# EAGLE board mainboard_eurobotics2010_r1 (EAGLE 4.16)
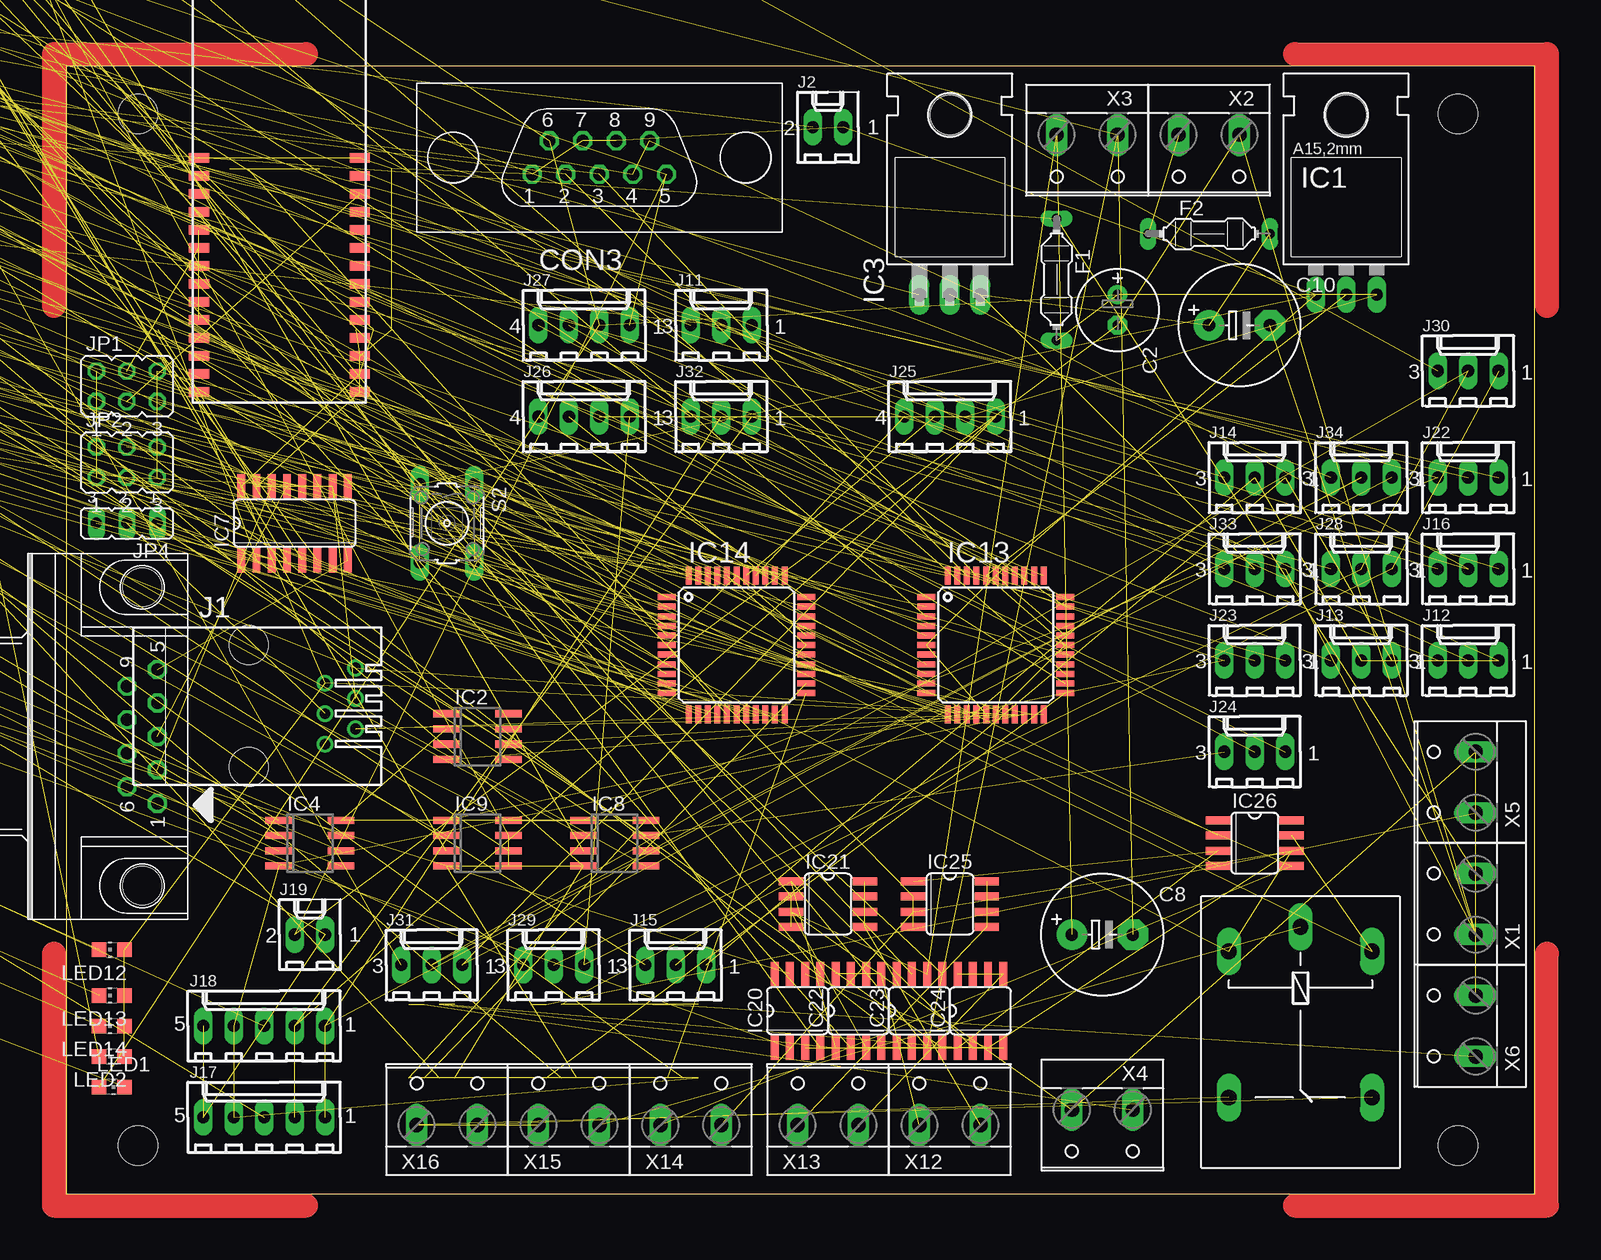
[diagram p0: board, top side]
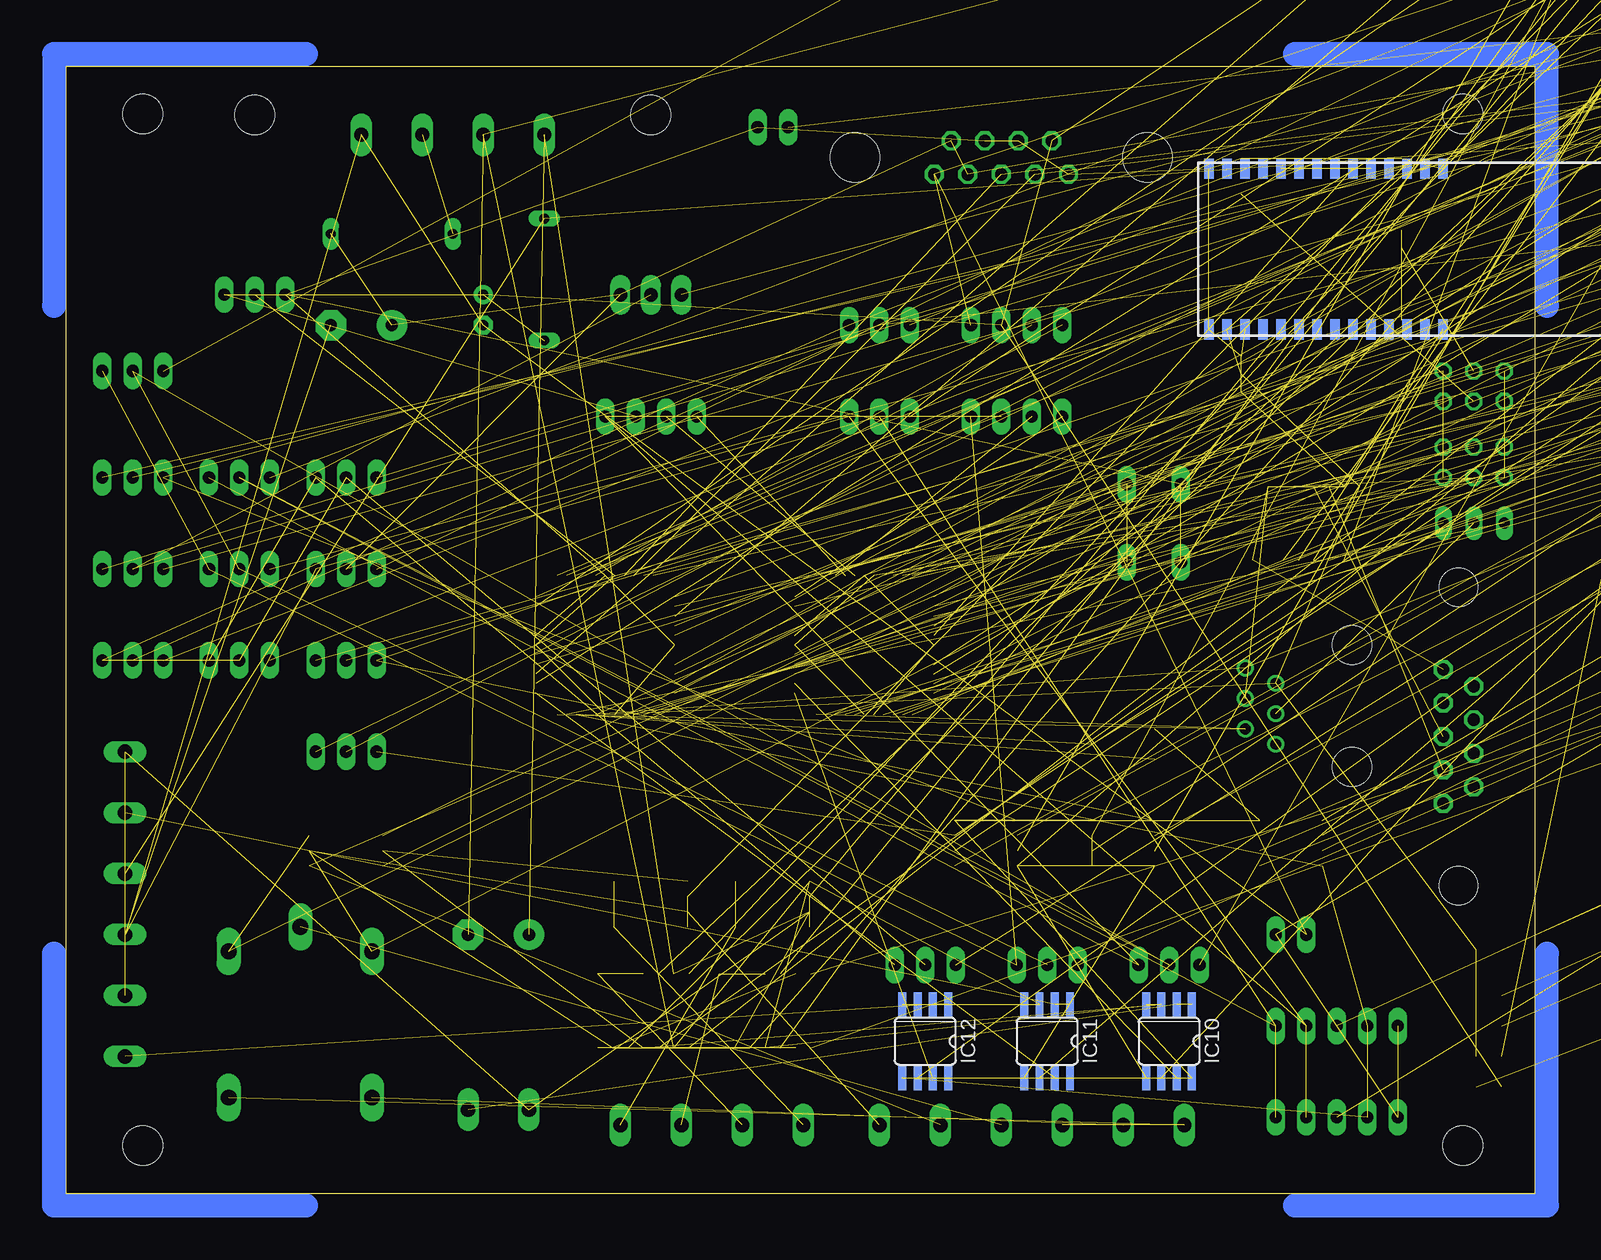
[diagram p1: board, bottom side, seen from below]

Size 122.4 x 94 mm. Coordinates in mm from the lower left corner, seen from the top.
Outline: 0,0 122.4,0 122.4,94 0,94 0,0
Copper layers (1*16): Top 0.035mm / dielectric 1.5mm / Bottom 0.035mm
Design rules "default": minimum track width 10mil, minimum drill 24mil, track to track 8mil, track to pad 8mil, pad to pad 8mil, via to via 8mil, smd to smd 8mil, copper to edge 40mil, drill to drill 8mil, minimum pad ring 10mil, minimum via ring 8mil, stop-mask expansion 4mil, vias tented up to drill 0mil, thermal gap 10mil
Holes 3.3 mm at 6,4 116,4 6,90 116,90

## Footprints (pad centres in the part's own frame; a part is rotated, then mirrored left to right if it is on the bottom)
C0805 = smd 1.3 x 1.5: 1 -0.85,0; 2 0.85,0
E2,5-7 = drill 0.813 pad 1.6 round: + -1.27,0 | drill 0.813 pad 1.6 octagon: - 1.27,0
SMC_D = smd 2.4 x 2.8: + -3.15,0; - 3.15,0
C1206 = smd 1.6 x 1.8: 1 -1.4,0; 2 1.4,0
E5-10,5 = drill 1.016 pad 2.54 round: + -2.54,0 | drill 1.016 pad 2.54 octagon: - 2.54,0
D-09F/90 = drill 1.016 pad 1.575 octagon: 1 -5.588,-1.27; 2 -2.794,-1.27; 3 0,-1.27; 4 2.794,-1.27; 5 5.588,-1.27; 6 -4.191,1.27; 7 -1.397,1.27; 8 1.397,1.27; 9 4.191,1.27 | hole 3.2: 12.446,0; -12.446,0
D-09F = drill 1.016 pad 1.575 octagon: 1 5.588,1.397; 2 2.794,1.397; 3 0,1.397; 4 -2.794,1.397; 5 -5.588,1.397; 6 4.191,-1.397; 7 1.397,-1.397; 8 -1.397,-1.397; 9 -4.191,-1.397 | hole 4.115: 12.192,0; -12.192,0
DIOM5436X265N = smd 2.2 x 2.05: A 2.2,0; K -2.2,0
PICOFUSE = drill 0.813 long: 1 -5.08,0; 2 5.08,0
TO220L1 = drill 1.016 long: 1 -2.54,-3.81; 2 0,-3.81; 3 2.54,-3.81 | hole 3.302: 0,11.176
SOIC8 = smd 0.6 x 2.2: 1 -1.905,-2.6; 2 -0.635,-2.6; 3 0.635,-2.6; 4 1.905,-2.6; 5 1.905,2.6; 6 0.635,2.6; 7 -0.635,2.6; 8 -1.905,2.6
TO220H = drill 1.118 long: 1 -2.54,-10.16; 2 0,-10.16; 3 2.54,-10.16 | hole 3.302: 0,4.826
SO08 = smd 0.6 x 2.2: 1 -1.905,-2.6; 2 -0.635,-2.6; 3 0.635,-2.6; 4 1.905,-2.6; 5 1.905,2.6; 6 0.635,2.6; 7 -0.635,2.6; 8 -1.905,2.6
WT11 = smd 1.7 x 0.8: 1 -6.7,2.5; 2 -6.7,1; 3 -6.7,-0.5; 4 -6.7,-2; 5 -6.7,-3.5; 6 -6.7,-5; 7 -6.7,-6.5; 8 -6.7,-8; 9 -6.7,-9.5; 10 -6.7,-11; 11 -6.7,-12.5; 12 -6.7,-14; 13 -6.7,-15.5; 14 -6.7,-17; 15 6.7,-17; 16 6.7,-15.5; 17 6.7,-14; 18 6.7,-12.5; 19 6.7,-11; 20 6.7,-9.5; 21 6.7,-8; 22 6.7,-6.5; 23 6.7,-5; 24 6.7,-3.5; 25 6.7,-2; 26 6.7,-0.5; 27 6.7,1; 28 6.7,2.5
SO16 = smd 0.66 x 2.032: 1 -4.445,-3.073; 2 -3.175,-3.073; 3 -1.905,-3.073; 4 -0.635,-3.073; 5 0.635,-3.073; 6 1.905,-3.073; 7 3.175,-3.073; 8 4.445,-3.073; 9 4.445,3.073; 10 3.175,3.073; 11 1.905,3.073; 12 0.635,3.073; 13 -0.635,3.073; 14 -1.905,3.073; 15 -3.175,3.073; 16 -4.445,3.073
SO08' = smd 0.66 x 2.032: 1 -1.905,-3.073; 2 -0.635,-3.073; 3 0.635,-3.073; 4 1.905,-3.073; 5 1.905,3.073; 6 0.635,3.073; 7 -0.635,3.073; 8 -1.905,3.073
TQFP44 = smd 1.5 x 0.5: 1 -5.8,4; 2 -5.8,3.2; 3 -5.8,2.4; 4 -5.8,1.6; 5 -5.8,0.8; 6 -5.8,0; 7 -5.8,-0.8; 8 -5.8,-1.6; 9 -5.8,-2.4; 10 -5.8,-3.2; 11 -5.8,-4; 23 5.8,-4; 24 5.8,-3.2; 25 5.8,-2.4; 26 5.8,-1.6; 27 5.8,-0.8; 28 5.8,0; 29 5.8,0.8; 30 5.8,1.6; 31 5.8,2.4; 32 5.8,3.2; 33 5.8,4 | smd 0.5 x 1.5: 12 -4,-5.8; 13 -3.2,-5.8; 14 -2.4,-5.8; 15 -1.6,-5.8; 16 -0.8,-5.8; 17 0,-5.8; 18 0.8,-5.8; 19 1.6,-5.8; 20 2.4,-5.8; 21 3.2,-5.8; 22 4,-5.8; 34 4,5.8; 35 3.2,5.8; 36 2.4,5.8; 37 1.6,5.8; 38 0.8,5.8; 39 0,5.8; 40 -0.8,5.8; 41 -1.6,5.8; 42 -2.4,5.8; 43 -3.2,5.8; 44 -4,5.8
520470-3 = drill 0.889 round: 1 -3.175,8.89; 2 -1.905,6.35; 3 -0.635,8.89; 4 0.635,6.35; 5 1.905,8.89; 6 3.175,6.35 | hole 3.251: -5.08,0; 5.08,0
6410-02 = drill 1.016 long: 1 1.27,0; 2 -1.27,0
6410-03 = drill 1.016 long: 1 2.54,0; 2 0,0; 3 -2.54,0
6410-05 = drill 1.016 long: 1 5.08,0; 2 2.54,0; 3 0,0; 4 -2.54,0; 5 -5.08,0
6410-04 = drill 1.016 long: 1 3.81,0; 2 1.27,0; 3 -1.27,0; 4 -3.81,0
JP3Q = drill 0.914 octagon: 1 -2.54,-1.27; 2 -2.54,1.27; 3 0,-1.27; 4 0,1.27; 5 2.54,-1.27; 6 2.54,1.27
JP2 = drill 0.914 long: 1 -2.54,0; 2 0,0; 3 2.54,0
G5LE = drill 1.321 long: 1 -7.493,-5.969; 2 -7.493,5.969; O 4.699,5.969; P -9.525,0; S 4.699,-5.969
CHIP-LED0805 = smd 1.2 x 1.2: A 0,-1.05; C 0,1.05
R0805 = smd 1.3 x 1.5: 1 -0.85,0; 2 0.85,0
B3F-10XX = drill 1.016 long: 1 -3.251,2.261; 2 3.251,2.261; 3 -3.251,-2.261; 4 3.251,-2.261
W237-132 = drill 1.194 long: 1 -2.54,-0.635; 2 2.54,-0.635

## Placement (x,y rotation side)
C1  100nF  [C0805]  -144.78,142.24 0 top  (outside the outline)
C2  220uF/10V  [E2,5-7]  87.63,73.66 270 top
C3  47uF/6V  [SMC_D]  -33.02,102.87 0 top  (outside the outline)
C4  100nF  [C0805]  -156.21,142.24 0 top  (outside the outline)
C5  10uF/10V  [C1206]  -102.87,102.87 0 top  (outside the outline)
C6  100nF  [C0805]  -167.64,142.24 0 top  (outside the outline)
C7  100nF  [C0805]  -179.07,142.24 0 top  (outside the outline)
C8  220uF/35V  [E5-10,5]  86.36,21.59 0 top
C9  100nF  [C0805]  -190.5,142.24 0 top  (outside the outline)
C10  220uF/35V  [E5-10,5]  97.79,72.39 0 top
C11  100nF  [C0805]  -201.93,142.24 0 top  (outside the outline)
C12  47uF/16V  [SMC_D]  -48.26,102.87 0 top  (outside the outline)
C13  100nF  [C0805]  -213.36,142.24 0 top  (outside the outline)
C14  100nF  [C0805]  -224.79,142.24 0 top  (outside the outline)
C15  10uF/10V  [C1206]  -114.3,102.87 0 top  (outside the outline)
C16  100nF  [C0805]  -236.22,142.24 0 top  (outside the outline)
C17  100nF  [C0805]  -19.05,149.86 0 top  (outside the outline)
C18  100nF  [C0805]  -30.48,149.86 0 top  (outside the outline)
C19  100nF  [C0805]  -41.91,149.86 0 top  (outside the outline)
C20  100nF  [C0805]  -53.34,149.86 0 top  (outside the outline)
C21  100nF  [C0805]  -64.77,149.86 0 top  (outside the outline)
C22  100nF  [C0805]  -76.2,149.86 0 top  (outside the outline)
C23  10uF/10V  [C1206]  -125.73,102.87 0 top  (outside the outline)
C24  10uF/10V  [C1206]  -137.16,102.87 0 top  (outside the outline)
C25  100nF  [C0805]  -87.63,149.86 0 top  (outside the outline)
C26  100nF  [C0805]  -99.06,149.86 0 top  (outside the outline)
C27  100nF  [C0805]  -110.49,149.86 0 top  (outside the outline)
C28  100nF  [C0805]  -121.92,149.86 0 top  (outside the outline)
C29  100nF  [C0805]  -133.35,149.86 0 top  (outside the outline)
C30  100nF  [C0805]  -144.78,149.86 0 top  (outside the outline)
C34  10uF/35V  [C1206]  -148.59,102.87 0 top  (outside the outline)
C35  10uF/35V  [C1206]  -160.02,102.87 0 top  (outside the outline)
C36  10uF/35V  [C1206]  -171.45,102.87 0 top  (outside the outline)
CON1  [D-09F/90]  6.35,38.1 90 top
CON3  [D-09F]  44.45,86.36 180 top
D3  SS24  [DIOM5436X265N]  -62.23,102.87 0 top  (outside the outline)
D4  SS24  [DIOM5436X265N]  -74.93,102.87 0 top  (outside the outline)
F1  2.5A  [PICOFUSE]  82.55,76.2 270 top
F2  2.5A  [PICOFUSE]  95.25,80.01 0 top
IC1  LM1086CT-3.3  [TO220L1]  106.68,78.74 0 top
IC2  ADR443BRZ-R-8  [SOIC8]  34.29,38.1 270 top
IC3  LM338T  [TO220H]  73.66,85.09 0 top
IC4  MCP6022SN  [SO08]  20.32,29.21 270 top
IC5  WT11A  [WT11]  17.78,83.82 0 top
IC6  WT11A  [WT11]  10.16,78.74 270 bottom
IC7  MAX232ACSE  [SO16]  19.05,55.88 0 top
IC8  MCP6022SN  [SO08]  45.72,29.21 270 top
IC9  MCP6022SN  [SO08]  34.29,29.21 270 top
IC10  ADS713  [SO08']  30.48,12.7 180 bottom
IC11  ADS713  [SO08']  40.64,12.7 180 bottom
IC12  ADS713  [SO08']  50.8,12.7 180 bottom
IC13  DSPIC33FJXXMC804SMD  [TQFP44]  77.47,45.72 0 top
IC14  DSPIC33FJXXMC804SMD  [TQFP44]  55.88,45.72 0 top
IC20  TC4427  [SO08']  60.96,15.24 0 top
IC21  IRF7389  [SO08']  63.5,24.13 270 top
IC22  IRF7389  [SO08']  66.04,15.24 0 top
IC23  TC4427  [SO08']  71.12,15.24 0 top
IC24  IRF7389  [SO08']  76.2,15.24 0 top
IC25  IRF7389  [SO08']  73.66,24.13 270 top
IC26  TC4427  [SO08']  99.06,29.21 270 top
J1  [520470-3]  15.24,40.64 270 top
J2  [6410-02]  63.5,88.9 0 top
J11  [6410-03]  54.61,72.39 0 top
J12  [6410-03]  116.84,44.45 0 top
J13  [6410-03]  107.95,44.45 0 top
J14  [6410-03]  99.06,59.69 0 top
J15  [6410-03]  50.8,19.05 0 top
J16  [6410-03]  116.84,52.07 0 top
J17  [6410-05]  16.51,6.35 0 top
J18  [6410-05]  16.51,13.97 0 top
J19  [6410-02]  20.32,21.59 0 top
J22  [6410-03]  116.84,59.69 0 top
J23  [6410-03]  99.06,44.45 0 top
J24  [6410-03]  99.06,36.83 0 top
J25  [6410-04]  73.66,64.77 0 top
J26  [6410-04]  43.18,64.77 0 top
J27  [6410-04]  43.18,72.39 0 top
J28  [6410-03]  107.95,52.07 0 top
J29  [6410-03]  40.64,19.05 0 top
J30  [6410-03]  116.84,68.58 0 top
J31  [6410-03]  30.48,19.05 0 top
J32  [6410-03]  54.61,64.77 0 top
J33  [6410-03]  99.06,52.07 0 top
J34  [6410-03]  107.95,59.69 0 top
JP1  [JP3Q]  5.08,67.31 0 top
JP2  [JP3Q]  5.08,60.96 0 top
JP4  [JP2]  5.08,55.88 180 top
K2  G5LE  [G5LE]  102.87,12.7 270 top
LED1  [CHIP-LED0805]  3.81,8.89 270 top
LED2  [CHIP-LED0805]  3.81,11.43 90 top
LED3  [CHIP-LED0805]  -158.75,91.44 0 top  (outside the outline)
LED4  [CHIP-LED0805]  -165.1,91.44 0 top  (outside the outline)
LED5  [CHIP-LED0805]  -171.45,91.44 0 top  (outside the outline)
LED10  [CHIP-LED0805]  -177.8,91.44 0 top  (outside the outline)
LED11  [CHIP-LED0805]  -184.15,91.44 0 top  (outside the outline)
LED12  [CHIP-LED0805]  3.81,20.32 90 top
LED13  [CHIP-LED0805]  3.81,16.51 90 top
LED14  [CHIP-LED0805]  3.81,13.97 90 top
R1  0R  [R0805]  -218.44,102.87 0 top  (outside the outline)
R2  0R  [R0805]  -229.87,102.87 0 top  (outside the outline)
R3  470R  [R0805]  -241.3,102.87 0 top  (outside the outline)
R4  270R  [R0805]  -19.05,111.76 0 top  (outside the outline)
R5  0R  [R0805]  -30.48,111.76 0 top  (outside the outline)
R6  0R  [R0805]  -41.91,111.76 0 top  (outside the outline)
R7  0R  [R0805]  -53.34,111.76 0 top  (outside the outline)
R8  240R/1%  [R0805]  -64.77,111.76 0 top  (outside the outline)
R9  2K7  [R0805]  -76.2,111.76 0 top  (outside the outline)
R10  1K  [R0805]  -87.63,111.76 0 top  (outside the outline)
R11  1K  [R0805]  -99.06,111.76 0 top  (outside the outline)
R12  1K6/1%  [R0805]  -110.49,111.76 0 top  (outside the outline)
R13  0R  [R0805]  -121.92,111.76 0 top  (outside the outline)
R14  10K  [R0805]  -133.35,111.76 0 top  (outside the outline)
R15  10K  [R0805]  -144.78,111.76 0 top  (outside the outline)
R16  0R  [R0805]  -156.21,111.76 0 top  (outside the outline)
R17  4K7  [R0805]  -167.64,111.76 0 top  (outside the outline)
R18  4K7  [R0805]  -179.07,111.76 0 top  (outside the outline)
R19  270R  [R0805]  -190.5,111.76 0 top  (outside the outline)
R20  270R  [R0805]  -201.93,111.76 0 top  (outside the outline)
R21  270R  [R0805]  -213.36,111.76 0 top  (outside the outline)
R22  270R  [R0805]  -224.79,111.76 0 top  (outside the outline)
R23  22R  [R0805]  -236.22,111.76 0 top  (outside the outline)
R24  22R  [R0805]  -19.05,119.38 0 top  (outside the outline)
R25  2K2  [R0805]  -30.48,119.38 0 top  (outside the outline)
R26  2K2  [R0805]  -41.91,119.38 0 top  (outside the outline)
R27  0R  [R0805]  -53.34,119.38 0 top  (outside the outline)
R28  4K7  [R0805]  -64.77,119.38 0 top  (outside the outline)
R29  4K7  [R0805]  -76.2,119.38 0 top  (outside the outline)
R30  4K7  [R0805]  -87.63,119.38 0 top  (outside the outline)
R31  4K7  [R0805]  -99.06,119.38 0 top  (outside the outline)
R32  4K7  [R0805]  -110.49,119.38 0 top  (outside the outline)
R33  4K7  [R0805]  -121.92,119.38 0 top  (outside the outline)
R34  RD  [R0805]  -133.35,119.38 0 top  (outside the outline)
R35  10K  [R0805]  -144.78,119.38 0 top  (outside the outline)
R36  RC  [R0805]  -156.21,119.38 0 top  (outside the outline)
R37  RA  [R0805]  -167.64,119.38 0 top  (outside the outline)
R38  RB  [R0805]  -179.07,119.38 0 top  (outside the outline)
R39  RD  [R0805]  -190.5,119.38 0 top  (outside the outline)
R40  RC  [R0805]  -201.93,119.38 0 top  (outside the outline)
R41  RA  [R0805]  -213.36,119.38 0 top  (outside the outline)
R42  RB  [R0805]  -224.79,119.38 0 top  (outside the outline)
R43  2K2  [R0805]  -236.22,119.38 0 top  (outside the outline)
R44  2K2  [R0805]  -19.05,127 0 top  (outside the outline)
R45  22R  [R0805]  -30.48,127 0 top  (outside the outline)
R46  22R  [R0805]  -41.91,127 0 top  (outside the outline)
R47  2K2  [R0805]  -53.34,127 0 top  (outside the outline)
R48  2K2  [R0805]  -64.77,127 0 top  (outside the outline)
R49  2K2  [R0805]  -76.2,127 0 top  (outside the outline)
R50  2K2  [R0805]  -87.63,127 0 top  (outside the outline)
R51  2K2  [R0805]  -99.06,127 0 top  (outside the outline)
R52  270R  [R0805]  -110.49,127 0 top  (outside the outline)
R53  0R  [R0805]  -121.92,127 0 top  (outside the outline)
R54  10K/1%  [R0805]  -133.35,127 0 top  (outside the outline)
R55  10K/1%  [R0805]  -144.78,127 0 top  (outside the outline)
R56  4K7  [R0805]  -156.21,127 0 top  (outside the outline)
R57  4K7  [R0805]  -167.64,127 0 top  (outside the outline)
R58  4K7  [R0805]  -179.07,127 0 top  (outside the outline)
R59  4K7  [R0805]  -190.5,127 0 top  (outside the outline)
R60  10K/1%  [R0805]  -201.93,127 0 top  (outside the outline)
R61  10K/1%  [R0805]  -213.36,127 0 top  (outside the outline)
R62  10K/1%  [R0805]  -224.79,127 0 top  (outside the outline)
R63  10K/1%  [R0805]  -236.22,127 0 top  (outside the outline)
R64  10K/1%  [R0805]  -19.05,134.62 0 top  (outside the outline)
R65  10K/1%  [R0805]  -30.48,134.62 0 top  (outside the outline)
R66  0R  [R0805]  -41.91,134.62 0 top  (outside the outline)
R67  0R  [R0805]  -53.34,134.62 0 top  (outside the outline)
R68  0R  [R0805]  -64.77,134.62 0 top  (outside the outline)
R69  0R  [R0805]  -76.2,134.62 0 top  (outside the outline)
R70  4K7  [R0805]  -87.63,134.62 0 top  (outside the outline)
R71  4K7  [R0805]  -99.06,134.62 0 top  (outside the outline)
R72  10K/1%  [R0805]  -110.49,134.62 0 top  (outside the outline)
R73  1K/1%  [R0805]  -121.92,134.62 0 top  (outside the outline)
R74  10K/1%  [R0805]  -133.35,134.62 0 top  (outside the outline)
R75  10K/1%  [R0805]  -144.78,134.62 0 top  (outside the outline)
R76  2K/1%  [R0805]  -156.21,134.62 0 top  (outside the outline)
R77  10K/1%  [R0805]  -167.64,134.62 0 top  (outside the outline)
R78  0R  [R0805]  -179.07,134.62 0 top  (outside the outline)
R79  0R  [R0805]  -190.5,134.62 0 top  (outside the outline)
R95  4K7  [R0805]  -201.93,134.62 0 top  (outside the outline)
R96  4K7  [R0805]  -213.36,134.62 0 top  (outside the outline)
R97  4K7  [R0805]  -224.79,134.62 0 top  (outside the outline)
R98  4K7  [R0805]  -236.22,134.62 0 top  (outside the outline)
R99  4K7  [R0805]  -19.05,142.24 0 top  (outside the outline)
R100  4K7  [R0805]  -30.48,142.24 0 top  (outside the outline)
R101  4K7  [R0805]  -41.91,142.24 0 top  (outside the outline)
R102  4K7  [R0805]  -53.34,142.24 0 top  (outside the outline)
R103  4K7  [R0805]  -64.77,142.24 0 top  (outside the outline)
R104  4K7  [R0805]  -76.2,142.24 0 top  (outside the outline)
R105  4K7  [R0805]  -87.63,142.24 0 top  (outside the outline)
R106  4K7  [R0805]  -99.06,142.24 0 top  (outside the outline)
R107  4K7  [R0805]  -110.49,142.24 0 top  (outside the outline)
R108  4K7  [R0805]  -121.92,142.24 0 top  (outside the outline)
R109  2K2  [R0805]  -133.35,142.24 0 top  (outside the outline)
S2  [B3F-10XX]  31.75,55.88 270 top
X1  [W237-132]  116.84,24.13 90 top
X2  [W237-132]  95.25,87.63 180 top
X3  [W237-132]  85.09,87.63 180 top
X4  [W237-132]  86.36,6.35 180 top
X5  [W237-132]  116.84,34.29 90 top
X6  [W237-132]  116.84,13.97 90 top
X12  [W237-132]  73.66,6.35 0 top
X13  [W237-132]  63.5,6.35 0 top
X14  [W237-132]  52.07,6.35 0 top
X15  [W237-132]  41.91,6.35 0 top
X16  [W237-132]  31.75,6.35 0 top

## Library data of the parts
C1-C30 C34-C36 R1-R79 R95-R109 = rcl
CON1 CON3 = connect
D3 D4 = ipc-7351-diode
F1 F2 = fuse
IC1 = v-reg
IC2 IC5 IC6 IC10-IC14 IC20-IC26 = eagle_jbs_lib
IC3 IC4 IC8 IC9 = linear
IC7 = maxim-10
J1 = con-amp
J2 J11-J19 J22-J34 = con-molex
JP1 JP2 JP4 = jumper
K2 = relay
LED1-LED5 LED10-LED14 = led
S2 = switch-omron
X1-X6 X12-X16 = con-wago-508

## Nets
0V: C8.- C9.2 C34.1 C35.1 C36.1 IC10.3 IC10.4 IC11.3 IC11.4 IC12.3 IC12.4 IC20.3 IC21.1 IC22.1 IC23.3 IC24.1 IC25.1 IC26.3 R9.1 R25.1 R26.1 R27.2 R47.1 R48.1 R66.2 R67.1 R68.2 R69.1 R78.2 R79.1 X3.1
+3V3: C3.+ C4.1 C17.2 C18.2 IC1.2 IC5.2 IC5.16 IC6.2 IC6.16 IC7.16 IC13.17 IC13.28 IC13.40 IC14.17 IC14.28 IC14.40 J1.2 LED2.A LED10.A LED11.A LED12.A LED13.A LED14.A R14.2 R15.2
+3V_VREF: C7.1 IC2.6 IC13.19 IC14.19 R36.1 R40.1 R73.2
+5V: C1.1 C2.+ CON3.6 F1.2 IC1.3 J25.2 J26.2 J27.2 LED1.A R2.2 R17.2 R18.2 R28.2 R29.2 R30.2 R31.2 R32.2 R33.2 R43.2 R44.2 R49.2 R50.2 R51.2 R56.2 R57.2 R58.2 R59.2 R70.2 R71.2 R95.2 R97.2 R99.2 R101.2 R103.2 R105.2 R107.2 R109.2
+5V_ANALOG: C5.1 C6.1 C14.1 C15.2 C21.1 C22.1 C23.2 C24.2 C25.2 C27.2 C29.2 IC2.2 IC4.8 IC8.8 IC9.8 IC10.8 IC11.8 IC12.8 R2.1
+12V: C10.+ C11.1 CON3.4 CON3.9 F2.2 IC3.3 J17.1 J18.1 J28.2 J29.2 J30.2 J31.2 J32.2 J33.2 J34.2 LED4.A R35.2
+24V: C8.+ C9.1 C34.2 C35.2 C36.2 D3.K D4.K IC20.6 IC21.3 IC22.3 IC23.6 IC24.3 IC25.3 IC26.6 K2.1 LED3.A X3.2 X4.2 X5.2 X6.2 X14.2
AGND: C5.2 C6.2 C7.2 C14.2 C15.1 C21.2 C22.2 C23.1 C24.1 C25.1 C26.1 C27.1 C28.1 C29.1 C30.1 IC2.4 IC4.4 IC8.4 IC9.4 IC10.5 IC11.5 IC12.5 IC13.20 IC14.20 J17.4 J18.4 R7.1 R16.1 R38.1 R42.1 R53.1 R66.1 R68.1 R76.1 R78.1
ARM_ENC_CHA: IC13.38 J27.3
ARM_ENC_CHB: IC13.37 J27.4
ARM_MOT_BREAK_(5V): IC13.13 J23.1 R59.1
ARM_MOT_CURRENT: IC11.7 IC13.23
ARM_MOT_REV_(5V): IC13.12 J23.2 R58.1
ARM_MOT_VREF_N: IC13.15 R63.1
ARM_MOT_VREF_P: IC13.14 R61.1
ARM_VREF: IC9.1 J23.3 R55.2
BEACON_UART_RX: IC6.26 IC14.1
BEACON_UART_TX: IC6.6 IC14.5
COMPRESSOR_POWER: IC13.35 IC26.2 R51.1
CORN_INSIDE_SENSOR: IC13.25 J30.3 R99.1 R100.2
CORN_PUSH_PWM_(5V): IC13.4 J15.3 R32.1
FROM_TX_RS232_M: CON1.3 IC7.13
G_RST: IC13.18 IC14.18 J1.1 R15.1 S2.1 S2.2
GND: C3.- C4.2 C18.1 C20.1 CON1.5 CON3.1 CON3.7 CON3.8 IC1.1 IC5.1 IC5.14 IC5.15 IC5.17 IC5.28 IC6.1 IC6.14 IC6.15 IC6.17 IC6.28 IC7.8 IC7.10 IC7.15 IC13.6 IC13.16 IC13.29 IC13.39 IC14.6 IC14.16 IC14.29 IC14.39 J1.3 J2.1 R4.1 R5.1 R16.2 R27.1 R53.2 R67.2 R69.2 R79.2 S2.3 S2.4
GND_SERVO_5V: J11.1 J12.1 J13.1 J14.1 J15.1 R6.1
GND_SERVO_9.6V: C12.- C13.2 J16.1 R11.1 R12.1 R13.1
GNDIO: C1.2 C2.- C10.- C11.2 CON3.5 J17.2 J18.2 J19.2 J25.1 J26.1 J27.1 J28.1 J29.1 J30.1 J31.1 J32.1 J33.1 J34.1 R3.1 R5.2 R6.2 R7.2 R10.1 R13.2 R96.1 R98.1 R100.1 R102.1 R104.1 R106.1 R108.1 X1.1 X2.1
I2C_SCL_(5V): CON3.2 IC13.42 IC14.42 R18.1
I2C_SDA_(5V): CON3.3 IC13.41 IC14.41 R17.1
L_BALL_IN_SENSOR: IC13.27 J29.3 R97.1 R98.2
L_BALLS_LID_PWM_(5V): IC13.9 J13.3 R30.1
L_CORN_HOLD_PWM_(5V): IC13.36 J14.3 R31.1
L_ENC_CHA: IC14.36 J26.3
L_ENC_CHB: IC14.33 J26.4
L_MOT_BREAK_(5V): IC14.13 J22.1 R57.1
L_MOT_CURRENT: IC10.7 IC14.24
L_MOT_INA_(5V): IC13.10 IC23.2 R49.1
L_MOT_INB_(5V): IC13.11 IC23.4 R50.1
L_MOT_REV_(5V): IC14.12 J22.2 R56.1
L_MOT_VREF: IC8.1 J22.3 R54.2
L_MOT_VREF_N: IC14.15 R62.1
L_MOT_VREF_P: IC14.14 R60.1
LASER_BALL_SCAN: IC4.1 IC14.26 R34.2
LASER_CORN_SCAN: IC4.7 IC14.25 R39.2
MAIN_AUX1: IC14.4 J33.3 R105.1 R106.2
MAIN_AUX2: IC14.27 J34.3 R107.1 R108.2
MAIN_LED1: IC14.34 R19.1
MAIN_LED2: IC14.32 R20.1
MAIN_LED3: IC14.2 R21.1
MAIN_LED4: IC14.3 R22.1
MAIN_PGED: IC14.21 JP4.1
MAIN_UART_RX: IC14.44 JP1.1 JP2.2
MAIN_UART_TX: IC14.43 JP1.2 JP2.1
N$1: LED10.C R52.2
N$2: IC21.5 IC21.6 IC21.7 IC21.8 X12.2
N$3: IC3.1 R8.1 R12.2
N$4: IC22.5 IC22.6 IC22.7 IC22.8 X12.1
N$5: J17.3 R37.1
N$6: IC21.2 IC21.4 R24.2 R26.2
N$7: IC22.2 IC22.4 R23.2 R25.2
N$8: LED11.C R19.2
N$10: LED12.C R20.2
N$11: LED13.C R21.2
N$12: LED5.C R11.2
N$13: LED14.C R22.2
N$14: IC20.7 R23.1
N$15: IC20.5 R24.1
N$16: IC6.5 IC6.10
N$17: IC24.5 IC24.6 IC24.7 IC24.8 X13.2
N$18: IC25.5 IC25.6 IC25.7 IC25.8 X13.1
N$19: IC24.2 IC24.4 R46.2 R48.2
N$20: IC25.2 IC25.4 R45.2 R47.2
N$21: IC23.7 R45.1
N$22: IC23.5 R46.1
N$23: D3.A IC26.7 K2.2
N$24: K2.O X15.1 X16.1
N$26: K2.P X15.2
N$27: C16.2 IC7.1
N$30: C16.1 IC7.3
N$31: C19.2 IC7.4
N$32: C19.1 IC7.5
N$33: C17.1 IC7.2
N$34: C20.2 IC7.6
N$35: K2.S X16.2
N$36: IC4.2 R34.1 R36.2
N$38: D4.A IC26.5 X14.1
N$40: IC4.3 R37.2 R38.2
N$61: IC8.2 R54.1 R60.2
N$64: LED1.C R3.2
N$65: LED2.C R4.2
N$66: LED4.C R10.2
N$67: LED3.C R9.2
N$70: IC8.3 R62.2 R64.2
N$71: IC8.6 R72.1 R74.2
N$72: IC10.1 IC10.2 X4.1
N$73: C26.2 IC10.6
N$74: IC8.5 R75.2 R77.2
N$75: IC9.6 R73.1 R76.2
N$76: IC12.1 IC12.2 X6.1
N$77: C30.2 IC12.6
N$78: IC11.1 IC11.2 X5.1
N$79: C28.2 IC11.6
N$83: IC9.2 R55.1 R61.2
N$84: IC9.3 R63.2 R65.2
N$92: J17.5 J18.5 J19.1 R35.1
N$93: IC5.5 IC5.10
N$94: IC4.6 R39.1 R40.2
N$95: IC4.5 R41.2 R42.2
N$96: J18.3 R41.1
N$112: F1.1 R1.2 X1.2
N$113: F2.1 X2.2
PGEC: IC13.22 IC14.22 J1.5
PGED: J1.4 JP4.2
R_BALL_IN_SENSOR: IC13.26 J28.3 R95.1 R96.2
R_BALLS_LID_PWM_(5V): IC13.8 J11.3 R28.1
R_CORN_HOLD_PWM_(5V): IC13.33 J12.3 R29.1
R_ENC_CHA: IC14.38 J25.3
R_ENC_CHB: IC14.37 J25.4
R_MOT_BREAK_(5V): IC14.9 J24.1 R71.1
R_MOT_CURRENT: IC12.7 IC14.23
R_MOT_INA_(5V): IC13.2 IC20.2 R43.1
R_MOT_INB_(5V): IC13.3 IC20.4 R44.1
R_MOT_REV_(5V): IC14.8 J24.2 R70.1
R_MOT_VREF: IC8.7 J24.3 R72.2
R_MOT_VREF_N: IC14.11 R75.1
R_MOT_VREF_P: IC14.10 R74.1
RX_MAX232: IC7.12 JP2.4
RX_WT11: IC5.6 JP1.4
SERVOS_UART_(5V): IC13.1 J16.3 R33.1
SLAVE_LED1: IC13.5 R52.1
SLAVE_PGED: IC13.21 JP4.3
SLAVE_UART_RX: IC13.44 JP1.5 JP2.6
SLAVE_UART_TX: IC13.43 JP1.6 JP2.5
START_(5V): IC14.35 J2.2 R14.1
SUCKER_OBJ_SENSOR: IC13.24 J32.3 R103.1 R104.2
TO_RX_RS232_M: CON1.2 IC7.14
TX_MAX232: IC7.11 JP2.3
TX_WT11: IC5.26 JP1.3
VACUUM_EV_ENABLE: IC13.34 IC26.4 R109.1
VACUUM_SENSOR: IC13.32 J31.3 R101.1 R102.2
VCC_SERVO_5V: J11.2 J12.2 J13.2 J14.2 J15.2 R1.1
VCC_SERVO_9.6V: C12.+ C13.1 IC3.2 J16.2 LED5.A R8.2
VOFF_2V: IC9.5 IC9.7 R64.1 R65.1 R77.1

## Tracks (layer width: path | path; a pad name or v marks a point on that pad's centre or on a via)
0V  (30 unrouted)
+3V3  (24 unrouted)
+3V_VREF  (6 unrouted)
+5V  (36 unrouted)
+5V_ANALOG  (18 unrouted)
+12V  (16 unrouted)
+24V  (20 unrouted)
AGND  (34 unrouted)
ARM_ENC_CHA  (1 unrouted)
ARM_ENC_CHB  (1 unrouted)
ARM_MOT_BREAK_(5V)  (2 unrouted)
ARM_MOT_CURRENT  (1 unrouted)
ARM_MOT_REV_(5V)  (2 unrouted)
ARM_MOT_VREF_N  (1 unrouted)
ARM_MOT_VREF_P  (1 unrouted)
ARM_VREF  (2 unrouted)
BEACON_UART_RX  (1 unrouted)
BEACON_UART_TX  (1 unrouted)
COMPRESSOR_POWER  (2 unrouted)
CORN_INSIDE_SENSOR  (3 unrouted)
CORN_PUSH_PWM_(5V)  (2 unrouted)
FROM_TX_RS232_M  (1 unrouted)
G_RST  (5 unrouted)
GND  (41 unrouted)
GND_SERVO_5V  (5 unrouted)
GND_SERVO_9.6V  (5 unrouted)
GNDIO  (32 unrouted)
I2C_SCL_(5V)  (3 unrouted)
I2C_SDA_(5V)  (3 unrouted)
L_BALL_IN_SENSOR  (3 unrouted)
L_BALLS_LID_PWM_(5V)  (2 unrouted)
L_CORN_HOLD_PWM_(5V)  (2 unrouted)
L_ENC_CHA  (1 unrouted)
L_ENC_CHB  (1 unrouted)
L_MOT_BREAK_(5V)  (2 unrouted)
L_MOT_CURRENT  (1 unrouted)
L_MOT_INA_(5V)  (2 unrouted)
L_MOT_INB_(5V)  (2 unrouted)
L_MOT_REV_(5V)  (2 unrouted)
L_MOT_VREF  (2 unrouted)
L_MOT_VREF_N  (1 unrouted)
L_MOT_VREF_P  (1 unrouted)
LASER_BALL_SCAN  (2 unrouted)
LASER_CORN_SCAN  (2 unrouted)
MAIN_AUX1  (3 unrouted)
MAIN_AUX2  (3 unrouted)
MAIN_LED1  (1 unrouted)
MAIN_LED2  (1 unrouted)
MAIN_LED3  (1 unrouted)
MAIN_LED4  (1 unrouted)
MAIN_PGED  (1 unrouted)
MAIN_UART_RX  (2 unrouted)
MAIN_UART_TX  (2 unrouted)
N$1  (1 unrouted)
N$2  (4 unrouted)
N$3  (2 unrouted)
N$4  (4 unrouted)
N$5  (1 unrouted)
N$6  (3 unrouted)
N$7  (3 unrouted)
N$8  (1 unrouted)
N$10  (1 unrouted)
N$11  (1 unrouted)
N$12  (1 unrouted)
N$13  (1 unrouted)
N$14  (1 unrouted)
N$15  (1 unrouted)
N$16  (1 unrouted)
N$17  (4 unrouted)
N$18  (4 unrouted)
N$19  (3 unrouted)
N$20  (3 unrouted)
N$21  (1 unrouted)
N$22  (1 unrouted)
N$23  (2 unrouted)
N$24  (2 unrouted)
N$25
  Top 2: 20,-1 -1,-1 -1,20
N$26  (1 unrouted)
N$27  (1 unrouted)
N$28
  Top 2: 102.4,-1 123.4,-1 123.4,20
N$29
  Top 2: 20,95 -1,95 -1,74
N$30  (1 unrouted)
N$31  (1 unrouted)
N$32  (1 unrouted)
N$33  (1 unrouted)
N$34  (1 unrouted)
N$35  (1 unrouted)
N$36  (2 unrouted)
N$37
  Top 2: 123.4,74 123.4,95 102.4,95
N$38  (2 unrouted)
N$39
  Bottom 2: 20,-1 -1,-1 -1,20
N$40  (2 unrouted)
N$41
  Bottom 2: 102.4,-1 123.4,-1 123.4,20
N$42
  Bottom 2: 20,95 -1,95 -1,74
N$43
  Bottom 2: 123.4,74 123.4,95 102.4,95
N$61  (2 unrouted)
N$64  (1 unrouted)
N$65  (1 unrouted)
N$66  (1 unrouted)
N$67  (1 unrouted)
N$70  (2 unrouted)
N$71  (2 unrouted)
N$72  (2 unrouted)
N$73  (1 unrouted)
N$74  (2 unrouted)
N$75  (2 unrouted)
N$76  (2 unrouted)
N$77  (1 unrouted)
N$78  (2 unrouted)
N$79  (1 unrouted)
N$83  (2 unrouted)
N$84  (2 unrouted)
N$92  (3 unrouted)
N$93  (1 unrouted)
N$94  (2 unrouted)
N$95  (2 unrouted)
N$96  (1 unrouted)
N$112  (2 unrouted)
N$113  (1 unrouted)
PGEC  (2 unrouted)
PGED  (1 unrouted)
R_BALL_IN_SENSOR  (3 unrouted)
R_BALLS_LID_PWM_(5V)  (2 unrouted)
R_CORN_HOLD_PWM_(5V)  (2 unrouted)
R_ENC_CHA  (1 unrouted)
R_ENC_CHB  (1 unrouted)
R_MOT_BREAK_(5V)  (2 unrouted)
R_MOT_CURRENT  (1 unrouted)
R_MOT_INA_(5V)  (2 unrouted)
R_MOT_INB_(5V)  (2 unrouted)
R_MOT_REV_(5V)  (2 unrouted)
R_MOT_VREF  (2 unrouted)
R_MOT_VREF_N  (1 unrouted)
R_MOT_VREF_P  (1 unrouted)
RX_MAX232  (1 unrouted)
RX_WT11  (1 unrouted)
SERVOS_UART_(5V)  (2 unrouted)
SLAVE_LED1  (1 unrouted)
SLAVE_PGED  (1 unrouted)
SLAVE_UART_RX  (2 unrouted)
SLAVE_UART_TX  (2 unrouted)
START_(5V)  (2 unrouted)
SUCKER_OBJ_SENSOR  (3 unrouted)
TO_RX_RS232_M  (1 unrouted)
TX_MAX232  (1 unrouted)
TX_WT11  (1 unrouted)
VACUUM_EV_ENABLE  (2 unrouted)
VACUUM_SENSOR  (3 unrouted)
VCC_SERVO_5V  (5 unrouted)
VCC_SERVO_9.6V  (5 unrouted)
VOFF_2V  (4 unrouted)